# Altium PCB emoc.PcbDoc
Units mm, origin at the board's own origin, x right, y up, seen from the top; angles counter-clockwise.
Board outline 100 x 50 mm, 2 copper layers (Top Layer, Bottom Layer), stack 1.671 mm thick; 25 components, 25 nets, 164 pads, 214 vias.
Unrouted connection lines stored in the file: 44.
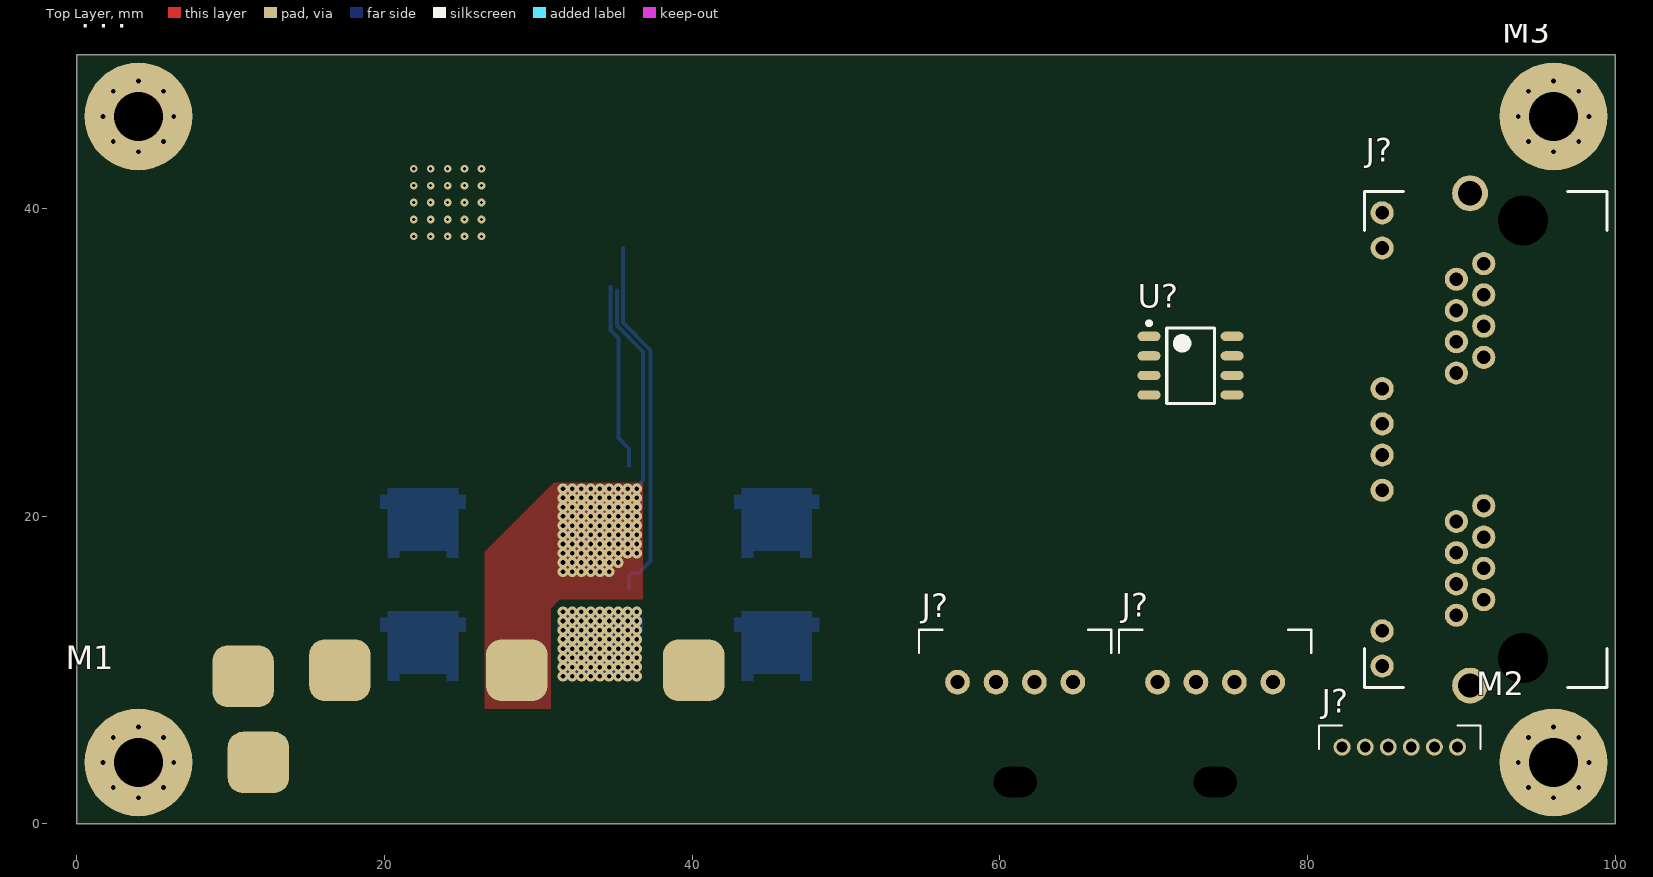
[diagram p0: Top Layer view]
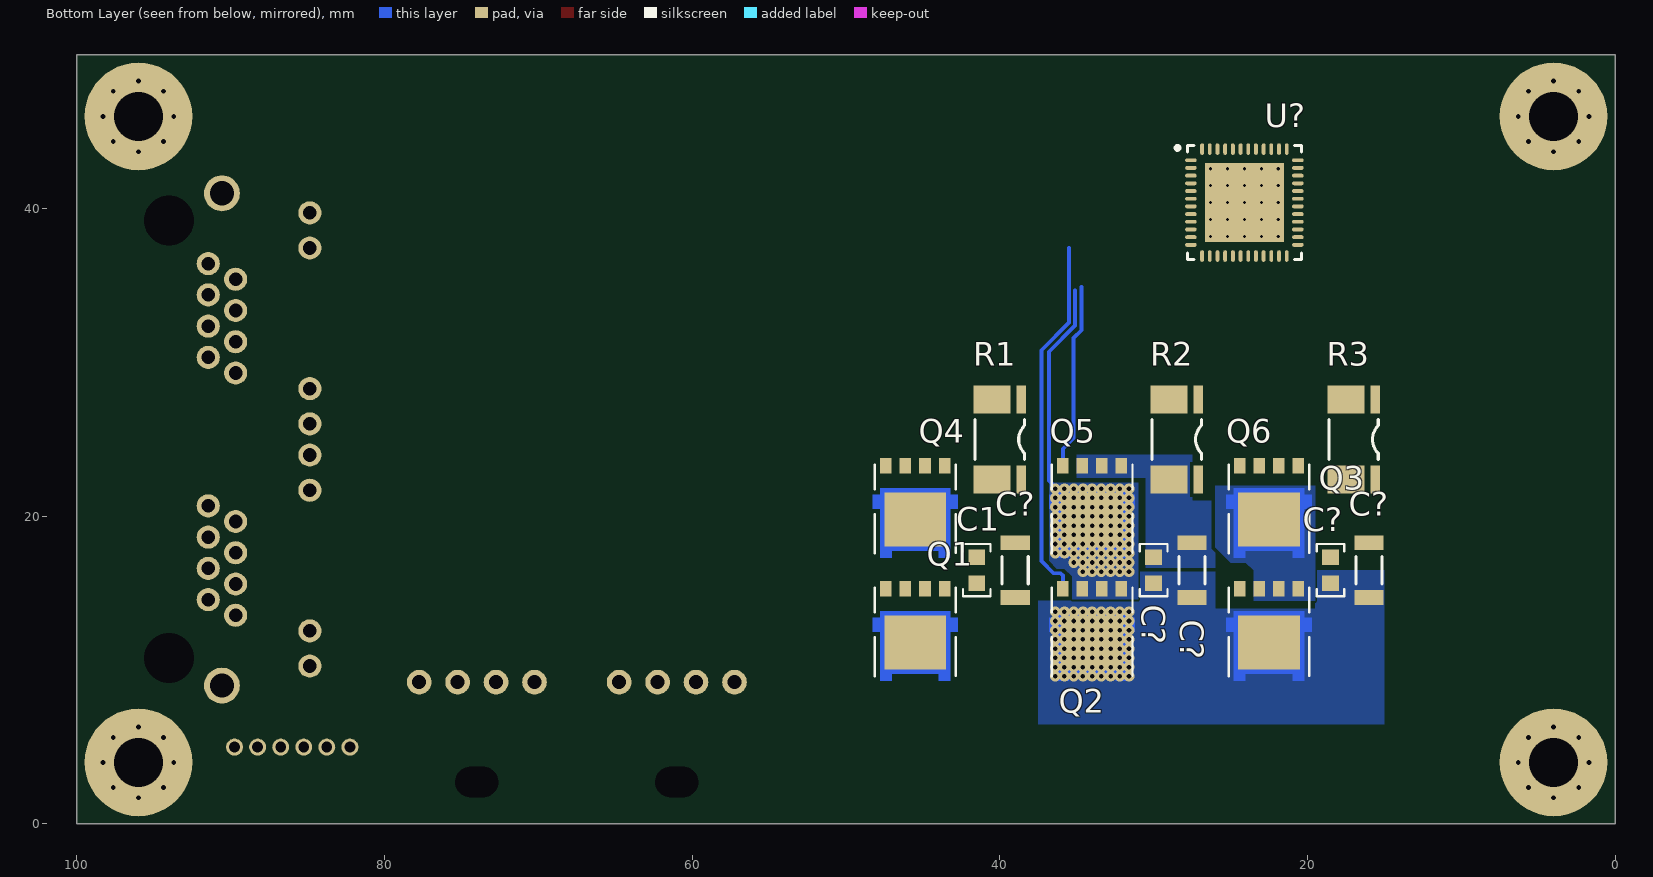
[diagram p1: Bottom Layer view, seen from below]

## Layer stack, top to bottom
Top Solder: solder mask 0.0102, Solder Resist, Dk 3.5
Top Layer: signal copper 0.0356
Dielectric 1: dielectric 1.6, FR-4, Dk 4.8
Bottom Layer: signal copper 0.0356
Bottom Solder: solder mask 0.0102, Solder Resist, Dk 3.5

## Board outline
0,0 100,0 100,50 0,50

## Design rules (kind name [scope] priority, off if disabled: settings)
Clearance [All] p1: gap=0.127 ignorepadtopadclearanceinfootprint=FALSE
HoleSize [All] p1: absolutevalues=TRUE maxlimit=6.3 minlimit=0.2 maxpercent=80.000 minpercent=20.000
MinimumAnnularRing [All] p1: minimumring=0.13
PolygonConnect PolygonConnect_Power [InNetClass('Power')] p1: connectstyle=Direct reliefconductorwidth=0.254 reliefentries=4 polygonreliefangle="90 Angle" airgapwidth=0.254
PolygonConnect PolygonConnect_Signal [All] p2: connectstyle=Relief reliefconductorwidth=0.254 reliefentries=4 polygonreliefangle="90 Angle" airgapwidth=0.254
RoomDefinition EMoC_Hardware [InComponentClass('EMoC_Hardware')] p1: confinementstyle=ConfineIn formatcopy=TRUE lockcomponents=FALSE outline 0,0 50.8,0 50.8,25.4 0,25.4
RoomDefinition EMoC_Contoller [InComponentClass('EMoC_Contoller')] p2: confinementstyle=ConfineIn formatcopy=TRUE lockcomponents=FALSE outline 81,2 99,2 99,40 81,40
RoomDefinition EMoC_PowerStage [InComponentClass('EMoC_PowerStage')] p3 off: confinementstyle=ConfineIn formatcopy=TRUE lockcomponents=FALSE outline 103.826,29.126 137.926,29.126 137.926,40.026 103.826,40.026
RoutingVias [All] p1: holewidth=0.3 width=0.7 viastyle="Through Hole" minholewidth=0.2 minwidth=0.45 maxholewidth=6.3 maxwidth=1.27
SolderMaskExpansion SolderMaskExpansion_VIa [IsVia] p1: expansion=0 istentingtop=TRUE
SolderMaskExpansion [All] p2: expansion=0.102 istentingtop=FALSE
Width [All] p1: maxlimit=0.254 minlimit=0.254 preferedwidth=0.254
29 further rules are at their usual default settings.

## Classes and differential pairs
net class Power: PGND PVDD SH_A SH_B SH_C SL_A SL_B SL_C
component class EMoC_Hardware: M1 M2 M3 M4
component class EMoC_Contoller: J? U?
component class EMoC_PowerStage: C1 C? Q1 Q2 Q3 Q4 Q5 Q6 R1 R2 R3 U?

## Components (designator, comment, footprint, x,y, rotation, side; value= is the part's Value field where it differs from the comment)
C1 "" C0603N 41.5,16.5 r270 bottom
C? "Capacitor 1 uF +/- 10% 25 V 1206" CAPC3216X180X20ML20 16,16.5 r90 bottom value=1µF
C? "" C0603N 18.5,16.5 r270 bottom
C? "" C0603N 30,16.5 r270 bottom
C? "Capacitor 1 uF +/- 10% 25 V 1206" CAPC3216X180X20ML20 39,16.5 r90 bottom value=1µF
C? "Capacitor 1 uF +/- 10% 25 V 1206" CAPC3216X180X20ML20 27.5,16.5 r90 bottom value=1µF
J? "RJHSE-X381-02" RJHSE-X38X-02 94,25 r90 top
J? "1744426-4" 1744426-4 74,9.225 r180 top
J? "1744426-4" 1744426-4 61,9.225 r180 top
J? "S6B-ZR" S6B-ZR 86,5 r180 top
M1 "Mounting_Screw" MOUNT_HOLE_3.2 0,0 r0 top locked
M2 "Mounting_Screw" MOUNT_HOLE_3.2 100,0 r90 top locked
M3 "Mounting_Screw" MOUNT_HOLE_3.2 100,50 r180 top locked
M4 "Mounting_Screw" MOUNT_HOLE_3.2 0,50 r270 top locked
Q1 "MOSFET-N" "DFN-5 (SO-8FL)" 45.5,12.5 r0 bottom
Q2 "MOSFET-N" "DFN-5 (SO-8FL)" 34,12.5 r0 bottom
Q3 "MOSFET-N" "DFN-5 (SO-8FL)" 22.5,12.5 r0 bottom
Q4 "MOSFET-N" "DFN-5 (SO-8FL)" 45.5,20.5 r0 bottom
Q5 "MOSFET-N" "DFN-5 (SO-8FL)" 34,20.5 r0 bottom
Q6 "MOSFET-N" "DFN-5 (SO-8FL)" 22.5,20.5 r0 bottom
R1 "R_KELVIN" CSS2H-2512N_KELVIN 40,25 r270 bottom
R2 "R_KELVIN" CSS2H-2512N_KELVIN 28.5,25 r270 bottom
R3 "R_KELVIN" CSS2H-2512N_KELVIN 17,25 r270 bottom
U? "NCV7351D1E" SOIC127P600X175-8N 72.4,29.8 r0 top
U? "DRV8323RSRGZR" QFN50P700X700X100_HS-49N 24.1,40.4 r180 bottom

## Footprints (in the part's own frame and the unit in brackets; to place one, negate y for a bottom-side part, rotate by r counter-clockwise, add the part's x,y. Pads: shape width x height; smd on the part's side, far side on the other; paste and mask are expansions set on the pad)
1744426-4 [mm] "CON, HEADER, EP2.5, R/A"
  round 1.6 hole 0.9 paste+0: 1(3.75,0) 2(1.25,0) 3(-1.25,0) 4(-3.75,0)
  round 0 hole 2 slot 2.8 at 0 deg unplated paste+0: 5(0,6.5)
  silkscreen extent -6.25,-3.4 6.25,-1.9, body extent -6.25,-3.4 6.25,9.2, height 7.6
C0603N [mm] "Chip Capacitor, 2-Leads, Body 1.60x0.80mm, IPC Medium Density"
  rect 1x1.1 smd: 1(-0.85,0) 2(0.85,0)
  silkscreen extent -1.7,-0.9 1.7,0.9, body extent -0.85,-0.45 0.85,0.45, height 0.8
CAPC3216X180X20ML20 [mm] "Chip Capacitor, 2-Leads, Body 3.40x1.80mm, IPC Low Density"
  rect 0.95x1.9 smd: 1(-1.775,0) 2(1.775,0)
  silkscreen extent -0.9,-0.85 0.9,0.85, body extent -1.7,-0.9 1.7,0.9, height 1.8
CSS2H-2512N_KELVIN [mm]
  rect 1.8x2.4 smd paste+0: 1(-2.6,-0.5) 2(2.6,-0.5)
  rect 1.8x0.6 smd paste+0: 3(-2.6,1.4) 4(2.6,1.4)
  silkscreen extent -1.3,-1.6 1.3,1.6, body extent -3.17,-1.52 3.18,1.53, height 0.83
"DFN-5 (SO-8FL)" [mm]
  rect 4x3.5 smd paste+0 mask+0: D(0,0.7)
  rect 0.75x1 smd: G(1.905,-2.795) S(-1.905,-2.795) S(-0.635,-2.795) S(0.635,-2.795)
  Top Layer region: -2.286,-1.33 -2.286,-0.905 -2.775,-0.905 -2.775,0 -2.28,0 -2.28,3.2 -1.53,3.2 -1.53,2.725 1.53,2.725 1.53,3.2 2.28,3.2 2.28,0 2.775,0 2.775,-0.905 2.28,-0.905 2.28,-1.33
  silkscreen extent -2.63,-2.87 2.63,2.9, body extent -2.58,-3.07 2.58,3.08, height 1
MOUNT_HOLE_3.2 [mm] "mouting hole for corners, D=3.20mm"
  round 7 hole 3.2 paste+0: 1(4,4)
  Top Layer pour cut-out: 0,0
  body extent 1.25,1.25 6.75,6.75, height 3
QFN50P700X700X100_HS-49N [mm] "QFN, 48-Leads, Body 7.00x7.00mm, Pitch 0.50mm, Thermal Pad 5.15x5.15mm, IPC Medium Density"
  oval 0.75x0.25 smd: 1(-3.475,2.75) 2(-3.475,2.25) 3(-3.475,1.75) 4(-3.475,1.25) 5(-3.475,0.75) 6(-3.475,0.25) 7(-3.475,-0.25) 8(-3.475,-0.75) 9(-3.475,-1.25) 10(-3.475,-1.75) 11(-3.475,-2.25) 12(-3.475,-2.75) 25(3.475,-2.75) 26(3.475,-2.25) 27(3.475,-1.75) 28(3.475,-1.25) 29(3.475,-0.75) 30(3.475,-0.25) 31(3.475,0.25) 32(3.475,0.75) 33(3.475,1.25) 34(3.475,1.75) 35(3.475,2.25) 36(3.475,2.75)
  oval 0.25x0.75 smd: 13(-2.75,-3.475) 14(-2.25,-3.475) 15(-1.75,-3.475) 16(-1.25,-3.475) 17(-0.75,-3.475) 18(-0.25,-3.475) 19(0.25,-3.475) 20(0.75,-3.475) 21(1.25,-3.475) 22(1.75,-3.475) 23(2.25,-3.475) 24(2.75,-3.475) 37(2.75,3.475) 38(2.25,3.475) 39(1.75,3.475) 40(1.25,3.475) 41(0.75,3.475) 42(0.25,3.475) 43(-0.25,3.475) 44(-0.75,3.475) 45(-1.25,3.475) 46(-1.75,3.475) 47(-2.25,3.475) 48(-2.75,3.475)
  rect 5.15x5.15 smd: 49(0,0)
  silkscreen extent -4.47,-3.7 3.7,3.7, body extent -3.6,-3.6 3.6,3.6, height 1
RJHSE-X38X-02 [mm]
  round 1.5 hole 0.89: 1-1(11.43,2.54) 1-2(10.414,4.318) 1-3(9.398,2.54) 1-4(8.382,4.318) 1-5(7.366,2.54) 1-6(6.35,4.318) 1-7(5.334,2.54) 1-8(4.318,4.318) 1-9(14.732,9.144) 1-10(12.446,9.144) 1-11(3.302,9.144) 1-12(1.016,9.144) 2-1(-4.318,2.54) 2-2(-5.334,4.318) 2-3(-6.35,2.54) 2-4(-7.366,4.318) 2-5(-8.382,2.54) 2-6(-9.398,4.318) 2-7(-10.414,2.54) 2-8(-11.43,4.318) 2-9(-1.016,9.144) 2-10(-3.302,9.144) 2-11(-12.446,9.144) 2-12(-14.732,9.144)
  round 0 hole 3.251 unplated: *(-14.224,0) *(14.224,0)
  round 2.337 hole 1.575: S1(16.002,3.429) S2(-16.002,3.429)
  silkscreen extent -16.13,-5.46 16.13,10.29, body extent -17.19,-6.09 17.19,10.46, height 14.52
S6B-ZR [mm]
  round 1.1 hole 0.7 paste+0: 1(3.75,0) 2(2.25,0) 3(0.75,0) 4(-0.75,0) 5(-2.25,0) 6(-3.75,0)
  silkscreen extent -5.25,-1.4 5.25,0.1, body extent -5.25,-1.4 5.25,4.6, height 3.7
SOIC127P600X175-8N [mm] "SOIC, 8-Leads, Body 4.90x3.90mm, Pitch 1.27mm, IPC Medium Density"
  oval 1.5x0.6 smd: 1(-2.7,1.905) 2(-2.7,0.635) 3(-2.7,-0.635) 4(-2.7,-1.905) 5(2.7,-1.905) 6(2.7,-0.635) 7(2.7,0.635) 8(2.7,1.905)
  silkscreen extent -2.82,-2.45 1.55,2.88, body extent -3,-2.45 3,2.45, height 1.75

## Part data
C1 C? C?: library part C
C? C? C?: library part CMP-001-00006-4, "Chip Capacitor, 1 uF, +/- 10%, 25 V, 1206 (3216 Metric)", Capacitor Type=Ceramic, Case/Package=1206, Max Operating Temperature=125°C, Min Operating Temperature=-55°C, Tolerance=10%, Voltage Rating=25V, Mounting Technology=SM, Pins=2, RoHS Compliant=True
J? J?: "CON, HEADER, EP2.5, 4POS, R/A, THT", Manufacturer 1="TE Connectivity", Manufacturer Part Number 1=1744426-4
J?: "CON, HEADER, 6POS, 1.5mm, R/A, THT", Manufacturer 1=JST, Manufacturer Part Number 1=S6B-ZR
U?: library part CMP-014-0000-1, Design Item ID=NCV7351D1E, Source=libysk_passive.SchLib
U?: library part CMP-031-00006-2, "IC, THREE-PHASE GATE DRIVER, 6-60V, 48QFN", Case/Package=48-VQFN, Max Gate Driver Output Current="1A(Source), 2A(Sink)", Max Operating Temperature=125°C, Max Supply Voltage=60V, Min Operating Temperature=-40°C, Min Supply Voltage=6V, ComponentLink1Description=Datasheet, ComponentLink1URL=https://www.ti.com/lit/ds/symlink/drv8323r.pdf, ComponentLink2Description="Manufacturer Product Page", ComponentLink2URL=https://www.ti.com/product/DRV8323R, Interface=SPI, Mount="Surface Mount", Mounting Technology=SMT, Packaging="Cut Tape", RoHS Compliant=Y

## Free pads (board coordinates)
  rrect50% 4x4 smd paste+0: N(10.8,9.6) P(11.8,4) SW_U(40.1,10) SW_W(17.1,10) ""(28.6,10)

## Via types
v1: diameter 0.7, hole 0.3, Top Layer to Bottom Layer, tented both sides, 157 vias
v2: diameter 0.7, hole 0.305, Top Layer to Bottom Layer, tented both sides, 32 vias
v3: diameter 0.5, hole 0.2, Top Layer to Bottom Layer, tented both sides, 25 vias

## Nets (pads, with @x,y where several pads share a name; then routed paths per layer and width w, separated by ;. In a path a pad name is that pad's centre, name@x,y a point inside that pad or via, vN(x,y) a via of type N, cw(c..) or ccw(c..) an arc to the next point about the centre after c; other vN are vias at no path point)
CAN_DC: J?.1-4 J?.1-5 J?.2-4 J?.2-5
GH_A: Q1.G U?.8@27.575,39.65
GH_B: Q2.G U?.17 | length 23.7
  Bottom Layer w0.254: 35.5,37.439 35.5,32.6 37.3,30.8 37.3,17.1 36.5,16.3 36.054,16.3 35.905,16.151 Q2.G
GH_C: Q3.G U?.18
GL_A: Q4.G U?.10
GL_B: Q5.G U?.15 | length 12.1
  Bottom Layer w0.254: 34.7,34.9 34.7,32.1 35.2,31.6 35.2,25.1 35.905,24.395 Q5.G
GL_C: Q6.G U?.20
GND: J?.1-3 J?.1-7 J?.1-8 J?.2-3 J?.2-7 J?.2-8 J?.S1 J?.S2
NetJ?_1-1: J?.1-1 J?.2-1
NetJ?_1-2: J?.1-2 J?.2-2
NetJ?_1-6: J?.1-6 J?.2-6
NetR1_3: R1.3
NetR1_4: R1.4
NetR2_3: R2.3
NetR2_4: R2.4
NetR3_3: R3.3
NetR3_4: R3.4
PGND: M1.1 M2.1 M3.1 M4.1 R1.1 R2.1 R3.1
  other v2: 4,1.7 96,1.7 2.374,2.374 5.626,2.374 94.374,2.374 97.626,2.374 1.7,4 6.3,4 93.7,4 98.3,4 2.374,5.626 5.626,5.626 94.374,5.626 97.626,5.626 4,6.3 96,6.3 4,43.7 96,43.7 2.374,44.374 5.626,44.374 94.374,44.374 97.626,44.374 1.7,46 6.3,46 93.7,46 98.3,46 2.374,47.626 5.626,47.626 94.374,47.626 97.626,47.626 4,48.3 96,48.3
PVDD: C1.2 C?.1@16,14.725 C?.1@27.5,14.725 C?.1@39,14.725 C?.2@18.5,15.65 C?.2@30,15.65 Q1.D Q2.D Q3.D
  other v1: 31.6,9.6 32.2,9.6 32.8,9.6 33.4,9.6 34,9.6 34.6,9.6 35.2,9.6 35.8,9.6 36.4,9.6 31.6,10.2 32.2,10.2 32.8,10.2 33.4,10.2 34,10.2 34.6,10.2 35.2,10.2 35.8,10.2 36.4,10.2 31.6,10.8 32.2,10.8 32.8,10.8 33.4,10.8 34,10.8 34.6,10.8 35.2,10.8 35.8,10.8 36.4,10.8 31.6,11.4 32.2,11.4 32.8,11.4 33.4,11.4 34,11.4 34.6,11.4 35.2,11.4 35.8,11.4 36.4,11.4 31.6,12 32.2,12 32.8,12 33.4,12 34,12 34.6,12 35.2,12 35.8,12 36.4,12 31.6,12.6 32.2,12.6 32.8,12.6 33.4,12.6 34,12.6 34.6,12.6 35.2,12.6 35.8,12.6 36.4,12.6 31.6,13.2 32.2,13.2 32.8,13.2 33.4,13.2 34,13.2 34.6,13.2 35.2,13.2 35.8,13.2 36.4,13.2 31.6,13.8 32.2,13.8 32.8,13.8 33.4,13.8 34,13.8 34.6,13.8 35.2,13.8 35.8,13.8 36.4,13.8
SH_A: Q1.S Q4.D U?.9
SH_B: pad. Q2.S Q5.D U?.16 | length 13.8
  Bottom Layer w0.254: 35.1,34.7 35.1,32.4 36.8,30.7 36.8,22.321 36.4,21.921 v1(36.4,21.8)
  other v1: 31.6,16.4 32.2,16.4 32.8,16.4 33.4,16.4 34,16.4 34.6,16.4 31.6,17 32.2,17 32.8,17 33.4,17 34,17 34.6,17 35.2,17 31.6,17.6 32.2,17.6 32.8,17.6 33.4,17.6 34,17.6 34.6,17.6 35.2,17.6 35.8,17.6 36.4,17.6 31.6,18.2 32.2,18.2 32.8,18.2 33.4,18.2 34,18.2 34.6,18.2 35.2,18.2 35.8,18.2 36.4,18.2 31.6,18.8 32.2,18.8 32.8,18.8 33.4,18.8 34,18.8 34.6,18.8 35.2,18.8 35.8,18.8 36.4,18.8 31.6,19.4 32.2,19.4 32.8,19.4 33.4,19.4 34,19.4 34.6,19.4 35.2,19.4 35.8,19.4 36.4,19.4 31.6,20 32.2,20 32.8,20 33.4,20 34,20 34.6,20 35.2,20 35.8,20 36.4,20 31.6,20.6 32.2,20.6 32.8,20.6 33.4,20.6 34,20.6 34.6,20.6 35.2,20.6 35.8,20.6 36.4,20.6 31.6,21.2 32.2,21.2 32.8,21.2 33.4,21.2 34,21.2 34.6,21.2 35.2,21.2 35.8,21.2 36.4,21.2 31.6,21.8 32.2,21.8 32.8,21.8 33.4,21.8 34,21.8 34.6,21.8 35.2,21.8 35.8,21.8
SH_C: Q3.S Q6.D U?.19
SL_A: C1.1 C?.2@39,18.275 Q4.S R1.2
SL_B: C?.1@30,17.35 C?.2@27.5,18.275 Q5.S R2.2
SL_C: C?.1@18.5,17.35 C?.2@16,18.275 Q6.S R3.2
pads on no net: J?.1 J?.1-9 J?.1-10 J?.1-11 J?.1-12 J?.2 J?.2-9 J?.2-10 J?.2-11 J?.2-12 J?.3 J?.4 J?.5 J?.6 J?.* U?.1 U?.2 U?.3 U?.4 U?.5 U?.6 U?.7 U?.8@75.1,31.705 U?.11 U?.12 U?.13 U?.14 U?.21 U?.22 U?.23 U?.24 U?.25 U?.26 U?.27 U?.28 U?.29 U?.30 U?.31 U?.32 U?.33 U?.34 U?.35 U?.36 U?.37 U?.38 U?.39 U?.40 U?.41 U?.42 U?.43 U?.44 U?.45 U?.46 U?.47 U?.48 U?.49
copper on no net:
  other v3: 21.9,38.2 23,38.2 24.1,38.2 25.2,38.2 26.3,38.2 21.9,39.3 23,39.3 24.1,39.3 25.2,39.3 26.3,39.3 21.9,40.4 23,40.4 24.1,40.4 25.2,40.4 26.3,40.4 21.9,41.5 23,41.5 24.1,41.5 25.2,41.5 26.3,41.5 21.9,42.6 23,42.6 24.1,42.6 25.2,42.6 26.3,42.6

## Polygon pours and split planes (outlines as drawn)
SH_B on Top Layer "SH_B_L01_P006" (solid, pour order 6): 31,22.2 26.5,17.7 26.5,7.5 30.8,7.5 30.8,14 31.4,14.6 36.8,14.6 36.8,22.2
no net on Top Layer "NONET_L01_P005" (solid, pour order 5): 10,40.5
no net on Top Layer "NONET_L01_P000" (solid, pour order 0): 19.5,22
SL_B on Bottom Layer "SL_B_L02_P004" (solid, pour order 4): 26,16.6 26,21 27.5,21 27.5,24 35,24 35,22.5 30.5,22.5 30.5,16.6
PVDD on Bottom Layer "PVDD_L02_P003" (solid, pour order 3): 19.5,14 26,14 26,16.4 31,16.4 31,14.5 37.5,14.5 37.5,6.5 15,6.5 15,16.5 19.5,16.5
SH_B on Bottom Layer "SH_B_L02_P002" (solid, pour order 2): 31,22.2 36.8,22.2 36.8,17.1 36.3,16.6 35.8,16.6 35.3,16.1 35.3,14.6 31,14.6 31,15 31,15.5
SH_C on Bottom Layer "SH_C_L02_P001" (solid, pour order 1): 19.5,22 26,22 26,18 25,17 24,17 23.5,16.5 23.5,14.5 19.5,14.5 19.5,15 19.5,15.5